# EAGLE board TSOC_RS485_EM (EAGLE 6.6.0)
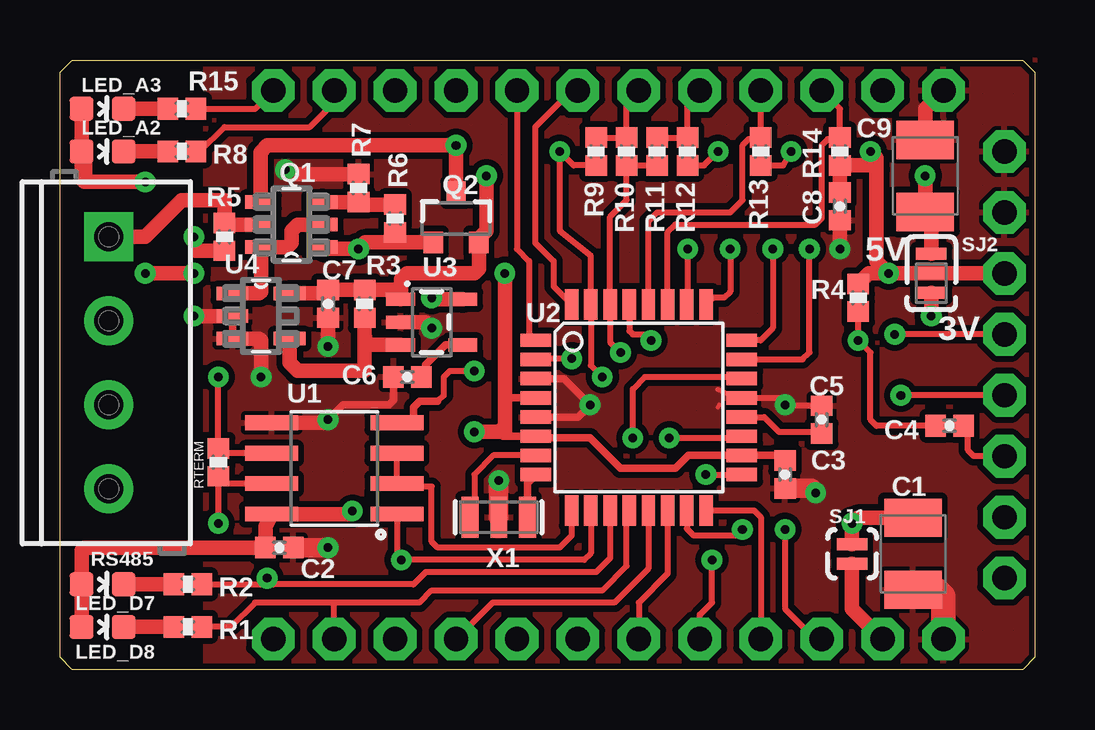
[diagram p0: board, top side]
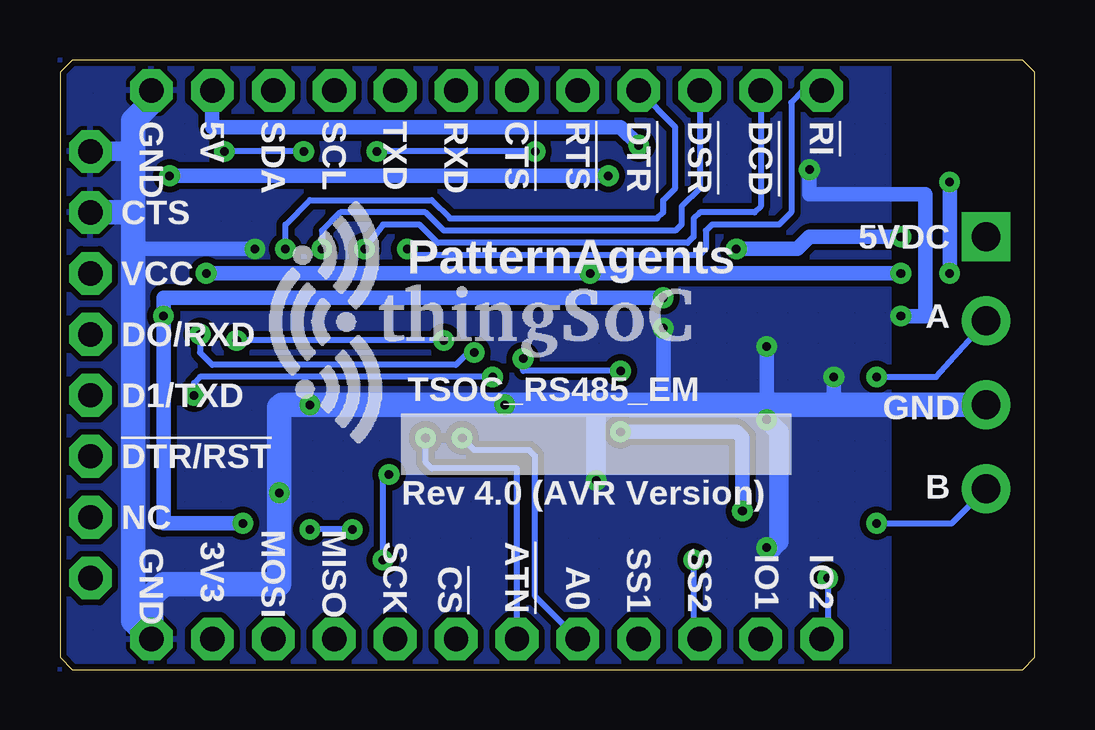
[diagram p1: board, bottom side, seen from below]

Size 40.64 x 25.4 mm. Coordinates in mm from the lower left corner, seen from the top.
Copper layers (1*16): Top 0.035mm / dielectric 1.5mm / Bottom 0.035mm
Design rules "PatternAgents_7mil": minimum track width 7mil, minimum drill 14mil, track to track 7mil, track to pad 7mil, pad to pad 7mil, via to via 7mil, smd to smd 7mil, copper to edge 7mil, drill to drill 7mil, minimum pad ring 12mil, minimum via ring 10mil, stop-mask expansion 4mil, vias tented up to drill 25mil, thermal gap 7mil
Net classes: 1 vcc: width 0.254 mm

## Footprints (pad centres in the part's own frame; a part is rotated, then mirrored left to right if it is on the bottom)
SMC_B = smd 1.6 x 2.4: + -1.5,0; - 1.5,0
0402-CAP = smd 0.85 x 0.9: 1 -0.58,0; 2 0.58,0
LED-0603 = smd 1 x 1: A 0,-0.877; C 0,0.877
SOT95P280X110-6N = smd 1.27 x 0.559: 1 -1.295,0.94; 2 -1.295,0; 3 -1.295,-0.94; 4 1.295,-0.94; 5 1.295,0; 6 1.295,0.94
SOT23-3 = smd 0.8 x 0.9: 1 -0.95,-1; 2 0.95,-1; 3 0,1.1
0402-RES = smd 0.85 x 0.9: 1 -0.58,0; 2 0.58,0
SCREWTERMINAL-3.5MM-4 = drill 1.2 pad 2.032 square: 1 0,0 | drill 1.2 pad 2.032: 2 3.5,0; 3 7,0; 4 10.5,0
JMP-2-NC = smd 0.508 x 1.27: 1 -0.401,0; 2 0.413,0
JMP-3-1_2 = smd 0.508 x 1.27: 1 -0.813,0; 2 0,0; 3 0.813,0
TSOC-BB-S32 = drill 1.016 pad 1.778 octagon: 1B -11.43,-11.43; 1C -11.43,11.43; 1E 19.05,-8.89; 2B -8.89,-11.43; 2C -8.89,11.43; 2E 19.05,-6.35; 3B -6.35,-11.43; 3C -6.35,11.43; 3E 19.05,-3.81; 4B -3.81,-11.43; 4C -3.81,11.43; 4E 19.05,-1.27; 5B -1.27,-11.43; 5C -1.27,11.43; 5E 19.05,1.27; 6B 1.27,-11.43; 6C 1.27,11.43; 6E 19.05,3.81; 7B 3.81,-11.43; 7C 3.81,11.43; 7E 19.05,6.35; 8B 6.35,-11.43; 8C 6.35,11.43; 8E 19.05,8.89; 9B 8.89,-11.43; 9C 8.89,11.43; 10B 11.43,-11.43; 10C 11.43,11.43; 11B 13.97,-11.43; 11C 13.97,11.43; 12B 16.51,-11.43; 12C 16.51,11.43
SO08 = smd 0.61 x 2.21: 1 -1.905,-2.616; 2 -0.635,-2.616; 3 0.635,-2.616; 4 1.905,-2.616; 5 1.905,2.616; 6 0.635,2.616; 7 -0.635,2.616; 8 -1.905,2.616
TQFP32-08 = smd 1.27 x 0.559: 1 -4.293,2.8; 2 -4.293,2; 3 -4.293,1.2; 4 -4.293,0.4; 5 -4.293,-0.4; 6 -4.293,-1.2; 7 -4.293,-2; 8 -4.293,-2.8; 17 4.293,-2.8; 18 4.293,-2; 19 4.293,-1.2; 20 4.293,-0.4; 21 4.293,0.4; 22 4.293,1.2; 23 4.293,2; 24 4.293,2.8 | smd 0.559 x 1.27: 9 -2.8,-4.293; 10 -2,-4.293; 11 -1.2,-4.293; 12 -0.4,-4.293; 13 0.4,-4.293; 14 1.2,-4.293; 15 2,-4.293; 16 2.8,-4.293; 25 2.8,4.293; 26 2,4.293; 27 1.2,4.293; 28 0.4,4.293; 29 -0.4,4.293; 30 -1.2,4.293; 31 -2,4.293; 32 -2.8,4.293
SOT23-5 = smd 0.55 x 1.2: 1 -0.95,-1.3; 2 0,-1.3; 3 0.95,-1.3; 4 0.95,1.3; 5 -0.95,1.3
SOP95P275X110-5N = smd 1.321 x 0.559: 1 -1.194,0.94; 2 -1.194,0; 3 -1.194,-0.94; 4 1.194,-0.94; 5 1.194,0.94
RESONATOR-SMD = smd 0.7 x 1.7: 1 -1.2,0; 2 0,0; 3 1.2,0

## Placement (x,y rotation side)
C1  22uF  [SMC_B]  35.56,4.83 270 top
C2  0.1uF  [0402-CAP]  9.14,5.08 0 top
C3  0.1uF  [0402-CAP]  30.23,8.13 90 top
C4  0.1uF  [0402-CAP]  37.08,10.16 180 top
C5  0.1uF  [0402-CAP]  31.75,10.41 270 top
C6  470pF  [0402-CAP]  14.48,12.19 180 top
C7  0.1uF  [0402-CAP]  11.18,15.24 270 top
C8  0.1uF  [0402-CAP]  32.51,19.3 270 top
C9  22uF  [SMC_B]  36.07,20.57 90 top
LED_A2  [LED-0603]  1.78,21.59 270 top
LED_A3  [LED-0603]  1.78,23.37 270 top
LED_D7  [LED-0603]  1.78,3.56 270 top
LED_D8  [LED-0603]  1.78,1.78 270 top
Q1  FDC6420C  [SOT95P280X110-6N]  9.65,18.54 180 top
Q2  MOSFET-NCHANNELAO3404A  [SOT23-3]  16.51,18.8 0 top
R1  1K  [0402-RES]  5.33,1.78 0 top
R2  1K  [0402-RES]  5.33,3.56 0 top
R3  10K  [0402-RES]  12.7,15.24 90 top
R4  10K  [0402-RES]  33.27,15.49 90 top
R5  100  [0402-RES]  6.86,18.03 270 top
R6  4K7  [0402-RES]  13.97,18.8 90 top
R7  6K8  [0402-RES]  12.45,20.07 90 top
R8  1K  [0402-RES]  5.08,21.59 0 top
R9  DNP  [0402-RES]  22.35,21.59 270 top
R10  1K  [0402-RES]  23.62,21.59 270 top
R11  DNP  [0402-RES]  24.89,21.59 270 top
R12  1K  [0402-RES]  26.16,21.59 270 top
R13  4K7  [0402-RES]  29.21,21.59 90 top
R14  4K7  [0402-RES]  32.51,21.59 90 top
R15  1K  [0402-RES]  5.08,23.37 0 top
RS485  [SCREWTERMINAL-3.5MM-4]  2.03,18.03 270 top
RTERM  120  [0402-RES]  6.6,8.64 90 top
SJ1  JMP-2-NC  [JMP-2-NC]  33.02,4.83 270 top
SJ2  JMP-3-1_2  [JMP-3-1_2]  36.32,16.51 90 top
TSOC  TSOC-32-BB  [TSOC-BB-S32]  20.32,12.7 0 top
U1  ST1480ACSOIC  [SO08]  11.43,8.38 90 top
U2  ATMEGA328  [TQFP32-08]  24.13,10.92 0 top
U3  MIC5219 3.3V  [SOT23-5]  15.49,14.48 270 top
U4  NCP361SNT1G  [SOP95P275X110-5N]  8.38,14.73 0 top
U$1  TSOC-PCB-EM-BB  [TSOC-EM-BB]  20.32,12.7 0 top
U$100  TSOC-LOGO-LRG  [TSOC-LOGO-LRG]  28.7,14.48 0 bottom
X1  RESONATORSMD  [RESONATOR-SMD]  18.29,6.35 180 top

## Library data of the parts
C1 C9 = rcl
C2-C8 LED_A2 LED_A3 LED_D7 LED_D8 R1-R15 RTERM U1 U$1 = TSOC-MODBUS-ESM
Q1 = TSOC-ESP8266-BASE
Q2 = SparkFun-DiscreteSemi; PROD_ID: TRAN-12988
RS485 = SparkFun-Connectors
SJ1 = TSOC-MODBUS-ESM; BOM: EXCLUDE
SJ2 = PatternAgents-ProtoPads; BOM: EXCLUDE
TSOC U$100 = thingSoC
U2 X1 = SparkFun
U3 = TSOC-ESP8266-BASE; PROD_ID: VREG-09872
U4 = TSOC-ESP8266-BASE; MPN: NCP361SNT1G; OC_FARNELL: 1642242; OC_NEWARK: 01P0135; PACKAGE: TSOP-5; SUPPLIER: ON Semiconductor

## Nets
3V3: C1.+ SJ1.1 SJ2.1 U3.5
5V0: C7.1 C9.+ Q2.2 R3.2 SJ2.3 U3.1 U4.5
!5V0_FAULT: R3.1 U3.3 U4.4
!JRST: C4.1 TSOC.3E
!RST: C4.2 R4.1 U2.29
A: RS485.4 RTERM.1 U1.7
A0: TSOC.4C U2.23
A1: TSOC.3C U2.24
A2: R8.2 TSOC.2C U2.25
A3: R15.2 TSOC.1C U2.26
A4: R14.2 TSOC.10C U2.27
A5: R13.2 TSOC.9C U2.28
A6: TSOC.6B U2.19
A7: TSOC.5B U2.22
AREF: C5.2 U2.20
B: RS485.2 RTERM.2 U1.6
BYPASS1: C6.1 U3.4
D0: R10.2 R11.2 TSOC.5E U2.30
D1: R9.2 R12.2 TSOC.4E U2.31
D2: TSOC.6C U2.32
D3: TSOC.5C U2.1
D4: U1.4 U2.2
D5: U1.2 U1.3 U2.9
D6: TSOC.3B U1.1 U2.10
D7: R2.2 TSOC.1B U2.11
D8: R1.2 TSOC.2B U2.12
D9: TSOC.4B U2.13
D10: TSOC.7B U2.14
D11: TSOC.10B U2.15
D12: TSOC.9B U2.16
D13: TSOC.8B U2.17
EXT_5V0: Q1.5 R5.1 RS485.1
GND: C1.- C2.2 C3.1 C5.1 C6.2 C7.2 C8.2 C9.- R7.2 RS485.3 TSOC.7E TSOC.8E TSOC.12B TSOC.12C U1.5 U2.3 U2.5 U2.21 U3.2 U4.2 U4.3 X1.2
LED_A2: LED_A2.C R8.1
N$2: LED_D7.C R2.1
N$3: LED_A3.C R15.1
N$4: LED_D8.C R1.1
NGATE: Q1.1 Q2.1 R5.2 R6.1
PGATE: Q1.3 R6.2 R7.1
TSOC_3V3: SJ1.2 TSOC.11B
TSOC_5V0: Q1.4 Q2.3 TSOC.11C
TSOC_D0: R9.1 R10.1 TSOC.7C
TSOC_D1: R11.1 R12.1 TSOC.8C
VCC: C2.1 C3.2 C8.1 LED_A2.A LED_A3.A LED_D7.A LED_D8.A R4.2 R13.1 R14.1 SJ2.2 TSOC.6E U1.8 U2.4 U2.6 U2.18
VIN: Q1.2 Q1.6 U4.1
XIN: U2.7 X1.3
XOUT: U2.8 X1.1

## Tracks (layer width: path | path; a pad name or v marks a point on that pad's centre or on a via)
3V3  (via drill 0.36)
  Top 0.61: SJ1.1 v33.02,6.1 33.25,6.33 C1.+ | U3.5 15.56,15.43 v15.49,15.49 | SJ2.1 v36.32,14.73
  Bottom 0.61: v33.02,6.1 36.32,6.1 v36.32,14.73 36.32,15.49 v15.49,15.49
5V0  (via drill 0.36)
  Top 0.61: U4.5 11.03,15.67 C7.1 R3.2 14.08,15.82 U3.1 14.22,15.46 14.22,16.26 14.48,16.51 17.27,16.51 17.46,16.7 Q2.2 17.46,17.97 17.78,18.29 v17.78,20.57 | SJ2.3 36.32,18.82 C9.+ v36.07,20.57
  Bottom 0.61: v17.78,20.57 v36.07,20.57
!5V0_FAULT
  Top 0.61: 12.7,13.97 R3.1 | U3.3 12.77,13.53 12.7,13.97 | U4.4 9.58,12.78 9.91,12.45 12.7,12.45 12.7,13.97
!JRST
  Top 0.254: TSOC.3E 38.1,8.89 37.85,9.14 37.85,9.98 C4.1
!RST  (via drill 0.36)
  Top 0.254: U2.29 23.73,14.12 23.88,13.97 24.38,13.97 v24.64,13.72 | C4.2 34.04,10.16 33.78,10.41 33.78,13.21 v33.27,13.72 R4.1
  Bottom 0.254: v24.64,13.72 v33.27,13.72
A  (via drill 0.36)
  Top 0.254: U1.7 6.66,7.75 RTERM.1 v6.6,6.1
  Bottom 0.254: v6.6,6.1 3.47,6.1 RS485.4
A0  (via drill 0.36)
  Top 0.254: U2.23 30.96,12.92 31.24,13.21 v31.24,17.53
  Bottom 0.254: v31.24,17.53 31.24,18.54 30.23,19.56 25.15,19.56 24.38,18.8 15.75,18.8 15.49,19.05 15.49,19.56 14.99,20.07 14.99,22.61 TSOC.4C
A1  (via drill 0.36)
  Top 0.254: v29.72,17.53 29.72,14.22 29.21,13.72 U2.24
  Bottom 0.254: TSOC.3C 13.97,20.07 14.73,19.3 14.73,18.54 14.99,18.29 24.64,18.29 25.4,19.05 28.96,19.05 29.72,18.29 v29.72,17.53
A2  (via drill 0.36)
  Top 0.254: v27.94,17.53 27.94,15.75 27.69,15.49 27.21,15.49 U2.25 | R8.2 5.84,21.59 6.86,22.61 10.41,22.61 11.43,23.62 TSOC.2C
  Bottom 0.254: TSOC.2C 11.43,19.3 11.68,19.05 13.97,19.05 14.22,18.8 14.22,18.03 14.48,17.78 24.89,17.78 25.65,18.54 27.18,18.54 v27.94,17.53
A3  (via drill 0.36)
  Top 0.254: v26.16,17.53 26.16,15.25 U2.26 | R15.2 8.13,23.37 TSOC.1C
  Bottom 0.254: v26.16,17.53 25.91,17.27 13.97,17.27 13.72,17.53 13.72,18.29 13.46,18.54 10.67,18.54 10.16,19.05 10.16,23.62 9.65,24.13 TSOC.1C
A4
  Top 0.254: TSOC.10C 32.51,23.37 R14.2 32.44,22.1 32,22.1 31.75,21.84 31.75,18.8 31.5,18.54 25.65,18.54 25.33,18.22 U2.27
A5
  Top 0.254: TSOC.9C R13.2 29.14,22.1 28.7,22.1 28.45,21.84 28.45,19.56 27.94,19.05 24.89,19.05 24.53,18.69 U2.28
A6  (via drill 0.36)
  Top 0.254: v25.4,9.65 28.35,9.65 U2.19
  Bottom 0.254: TSOC.6B 21.59,8.38 25.15,8.38 25.4,8.64 v25.4,9.65
A7  (via drill 0.36)
  Top 0.254: v23.88,9.65 23.88,11.68 24.38,12.19 28.35,12.19 U2.22
  Bottom 0.254: TSOC.5B 20.83,3.05 20.83,8.89 21.08,9.14 23.37,9.14 v23.88,9.65
AREF
  Top 0.254: U2.20 29.36,10.52 29.97,9.91 31.68,9.91 C5.2
B  (via drill 0.36)
  Top 0.254: v6.6,12.19 RTERM.2 6.8,9.02 U1.6
  Bottom 0.254: v6.6,12.19 4.12,12.19 RS485.2
BYPASS1
  Top 0.305: U3.4 16.07,13.53 15.24,12.7 15.24,12.37 C6.1
D0  (via drill 0.36)
  Top 0.254: v23.37,13.21 22.93,13.65 U2.30 22.93,18.87 23.62,19.56 R10.2 R11.2 | TSOC.5E v34.8,13.97
  Bottom 0.254: v23.37,13.21 23.62,13.21 24.13,12.7 34.29,12.7 34.8,13.21 v34.8,13.97
D1  (via drill 0.36)
  Top 0.254: v22.61,12.19 22.13,12.67 U2.31 22.13,17.24 20.83,18.29 v20.83,21.59 21.41,21.01 R9.2 | TSOC.4E v35.05,11.43 | R12.2 26.85,21.01 v27.43,21.59
  Bottom 0.254: v22.61,12.19 34.8,12.19 35.05,11.94 v35.05,11.43 | v20.83,21.59 v27.43,21.59
D2
  Top 0.178: 21.33,23.87 TSOC.6C
  Top 0.254: 21.33,23.87 21.08,23.87 19.81,22.61 19.81,17.78 20.57,17.02 20.57,15.97 U2.32 21.3,15.24
D3
  Top 0.254: 20.07,13.72 U2.1 19.56,14 19.56,17.02 19.05,17.53 TSOC.5C
D4  (via drill 0.36)
  Top 0.254: v21.34,12.95 19.87,12.95 U2.2 | U1.4 14.7,10.24 14.81,10.24 | 15.75,11.18 16,11.43 16,12.19 16.26,12.45 v17.27,12.45
  Top 0.305: 15.75,11.18 14.99,11.18 14.73,10.92 14.73,10.27 14.7,10.24
  Bottom 0.254: v17.27,12.45 21.34,12.45 v21.34,12.95
D5
  Top 0.254: U2.9 21.33,5.58 20.83,5.08 15.75,5.08 15.49,5.33 15.49,7.62 14.43,7.62 U1.2 U1.3
D6  (via drill 0.36)
  Top 0.254: U2.10 22.13,4.86 21.84,4.57 v14.22,4.57 14.05,4.65 U1.1
  Bottom 0.254: v14.22,4.57 14.22,1.52 TSOC.3B
D7  (via drill 0.36)
  Top 0.254: U2.11 22.93,4.64 22.35,4.06 15.24,4.06 14.73,3.56 8.89,3.56 | 8.89,3.56 v8.64,3.81 | R2.2 8.89,3.56
  Bottom 0.254: TSOC.1B 8.64,1.52 v8.64,3.81
D8
  Top 0.254: 11.43,2.79 14.99,2.79 15.49,3.3 22.61,3.3 23.62,4.32 23.62,6.52 U2.12 | 11.43,2.79 8.13,2.79 7.11,1.78 R1.2 | TSOC.2B 11.43,2.79
D9
  Top 0.254: TSOC.4B 18.03,2.79 23.11,2.79 24.53,4.21 U2.13
D10
  Top 0.254: U2.14 25.33,3.99 24.13,2.79 TSOC.7B
D11  (via drill 0.36)
  Top 0.254: U2.15 26.13,5.87 26.42,5.59 28.19,5.59 v28.45,5.84 | v30.23,5.84 30.23,2.54 31.24,1.52 31.5,1.52 TSOC.10B
  Bottom 0.254: v28.45,5.84 v30.23,5.84
D12
  Top 0.254: U2.16 28.93,6.63 29.21,6.35 TSOC.9B
D13  (via drill 0.36)
  Top 0.254: TSOC.8B 26.67,2.29 27.18,2.79 v27.18,4.57 | v26.92,8.13 U2.17
  Bottom 0.254: v27.18,4.57 27.18,7.87 v26.92,8.13
EXT_5V0
  Top 0.178: 7.11,18.54 R5.1
  Top 0.61: Q1.5 7.11,18.54 6.93,18.54 | R5.1 6.86,19.56 5.08,19.56 3.56,18.03 RS485.1
GND  (via drill 0.36)
  Top 0.178: 28.19,11.34 28.19,11.43 U2.21 27.94,11.43 27.41,11.68 27.43,11.68 | 27.43,10.92 27.48,11.04
  Top 0.254: U2.21 29.94,11.32 v30.23,11.03 30.27,10.99 C5.1
  Top 0.305: U4.2 U4.3 | C6.2 13.9,11.22 13.72,11.03 11.8,11.03 v11.18,10.41 | 30.34,10.92 v30.23,11.03 | U2.3 21.01,12.12 v22.1,11.03 21.59,10.52 U2.5
  Top 0.61: U1.5 11.05,10.29 v11.18,10.41 | U4.3 8.31,13.79 8.38,13.72 v8.38,12.19 | C7.2 v11.18,13.46 | U3.2 15.24,14.48 v15.49,14.22 | C9.- 36.07,23.37 TSOC.12C | R7.2 9.58,20.65 v9.4,20.83 | v5.59,14.73 U4.2 | C8.2 v32.51,17.53
  Top 0.813: C2.2 v11.18,5.08 | X1.2 v18.29,7.87 | C3.1 31.31,7.55 v31.5,7.37
  Top 1.016: C1.- 36.55,3.33 36.83,3.05 TSOC.12B
  Bottom 0.61: v8.38,12.19 8.38,11.03 | v11.18,13.46 11.18,11.29 10.92,11.03 | v15.49,14.22 15.49,11.03 16.14,11.03 16.26,10.92 | v9.4,20.83 9.4,19.81 4.57,19.81 4.57,14.73 v5.59,14.73 | v32.51,17.53 37.59,17.53
  Bottom 0.813: 11.18,11.03 v11.18,10.41 10.67,9.91 10.67,5.33 10.92,5.08 v11.18,5.08 | v18.29,7.87 18.29,11.03 | TSOC.8E 37.59,21.59
  Bottom 1.016: RS485.3 8.38,11.03 10.92,11.03 11.18,11.03 15.49,11.03 18.29,11.03 v22.1,11.03 v30.23,11.03 31.38,11.03 31.5,10.92 v31.5,7.37 31.5,3.56 36.32,3.56 36.83,3.05 TSOC.12B 37.59,2.03 37.59,17.53 37.59,19.05 | TSOC.12C 36.83,23.62 37.59,22.86 37.59,21.59 37.59,19.05 | 37.59,19.05 TSOC.7E
  pour Top (isolate 0.254, hatched): 6.1,0 6.1,25.4 40.64,25.4 40.64,0
  pour Bottom (isolate 0.254, hatched): 6.1,0 6.1,25.4 40.64,25.4 40.64,0
LED_A2
  Top 0.61: LED_A2.C R8.1
N$2
  Top 0.61: LED_D7.C R2.1
N$3
  Top 0.61: LED_A3.C R15.1
N$4
  Top 0.61: LED_D8.C R1.1
NGATE  (via drill 0.36)
  Top 0.61: R5.2 5.66,17.45 v5.59,18.03 | Q1.1 11.02,17.53 v12.45,17.53 12.72,17.8 13.97,17.8 | Q2.1 13.97,17.8 | R6.1 13.97,17.8
  Bottom 0.61: v5.59,18.03 9.4,18.03 9.91,17.53 v12.45,17.53
PGATE
  Top 0.61: R6.2 12.56,19.38 R7.1 Q1.3
TSOC_3V3
  Top 0.61: SJ1.2 33.02,2.54 TSOC.11B
TSOC_5V0  (via drill 0.36)
  Top 0.61: Q1.4 8.36,21.57 8.64,21.84 v16.51,21.84 Q2.3
  Bottom 0.61: TSOC.11C 34.29,22.61 17.27,22.61 v16.51,21.84
TSOC_D0
  Top 0.254: R9.1 R10.1 23.62,23.62 TSOC.7C
TSOC_D1
  Top 0.254: R11.1 R12.1 26.16,23.62 TSOC.8C
VCC  (via drill 0.36)
  Top 0.178: 1.27,20.32 1.27,21.59 LED_A2.A | 18.54,9.65 18.54,9.72 18.54,9.91
  Top 0.254: 19.91,9.65 U2.6 | R13.1 30.15,21.01 v30.48,21.59
  Top 0.305: U2.6 18.54,9.72 18.47,9.72 | U2.4 18.65,11.32 18.54,11.43 | 19.91,9.65 22.1,9.65 23.37,8.38 25.65,8.38 26.19,8.92 U2.18 30.01,8.92 C3.2
  Top 0.61: LED_A3.A LED_A2.A 0.9,20.43 | C2.1 1.02,5.08 0.9,4.96 LED_D7.A LED_D8.A | TSOC.6E SJ2.2 v34.54,16.51 | 18.54,9.91 18.54,10.16 | 18.54,10.16 18.54,11.43 v18.54,16.51 | U1.8 8.76,6.48 | 8.64,5.15 C2.1 | U1.8 12.06,6.48 v12.19,6.6 | C2.1 8.56,5.97 U1.8 | 1.02,20.32 1.27,20.32 v3.56,20.32 | v3.56,16.51 v5.59,16.51 | v17.27,9.91 18.29,9.91 18.54,10.16 | C8.1 R14.1 33.85,21.01 34.04,20.83 | v34.54,16.51 34.04,17.02 34.04,20.83 | 34.04,20.83 34.04,21.34 v33.78,21.59 | v34.54,16.51 33.71,16.51 R4.2
  Bottom 0.254: v30.48,21.59 v33.78,21.59
  Bottom 0.61: v5.59,16.51 v18.54,16.51 v34.54,16.51 | v12.19,6.6 12.19,9.65 12.45,9.91 v17.27,9.91 | v3.56,20.32 v3.56,16.51
VIN
  Top 0.61: Q1.2 9.91,18.54 9.65,18.29 9.65,17.78 9.47,17.6 Q1.6 8.38,17.58 8.38,15.75 8.31,15.67 U4.1
XIN
  Top 0.254: U2.7 18.07,8.92 17.27,8.13 17.27,6.53 X1.3
  Top 0.305: 17.02,6.42 X1.3
XOUT
  Top 0.305: X1.1 19.49,7.77 U2.8

## Text on the board
tPlace: 5V | 3V
bPlace: !RI | !DCD | !DSR | !DTR | !RTS | !CTS | RXD | TXD | SCL | SDA | 5V | GND | CTS | 5VDC | PatternAgents | VCC | A | DO/RXD | TSOC_RS485_EM | D1/TXD | GND | !DTR/RST | B | Rev 4.0 (AVR Version) | MISO | MOSI | NC | IO2 | IO1 | SS2 | SS1 | !ATN | SCK | 3V3 | GND | A0 | !CS